# EAGLE board BURPS-v1.0 (EAGLE 5.12)
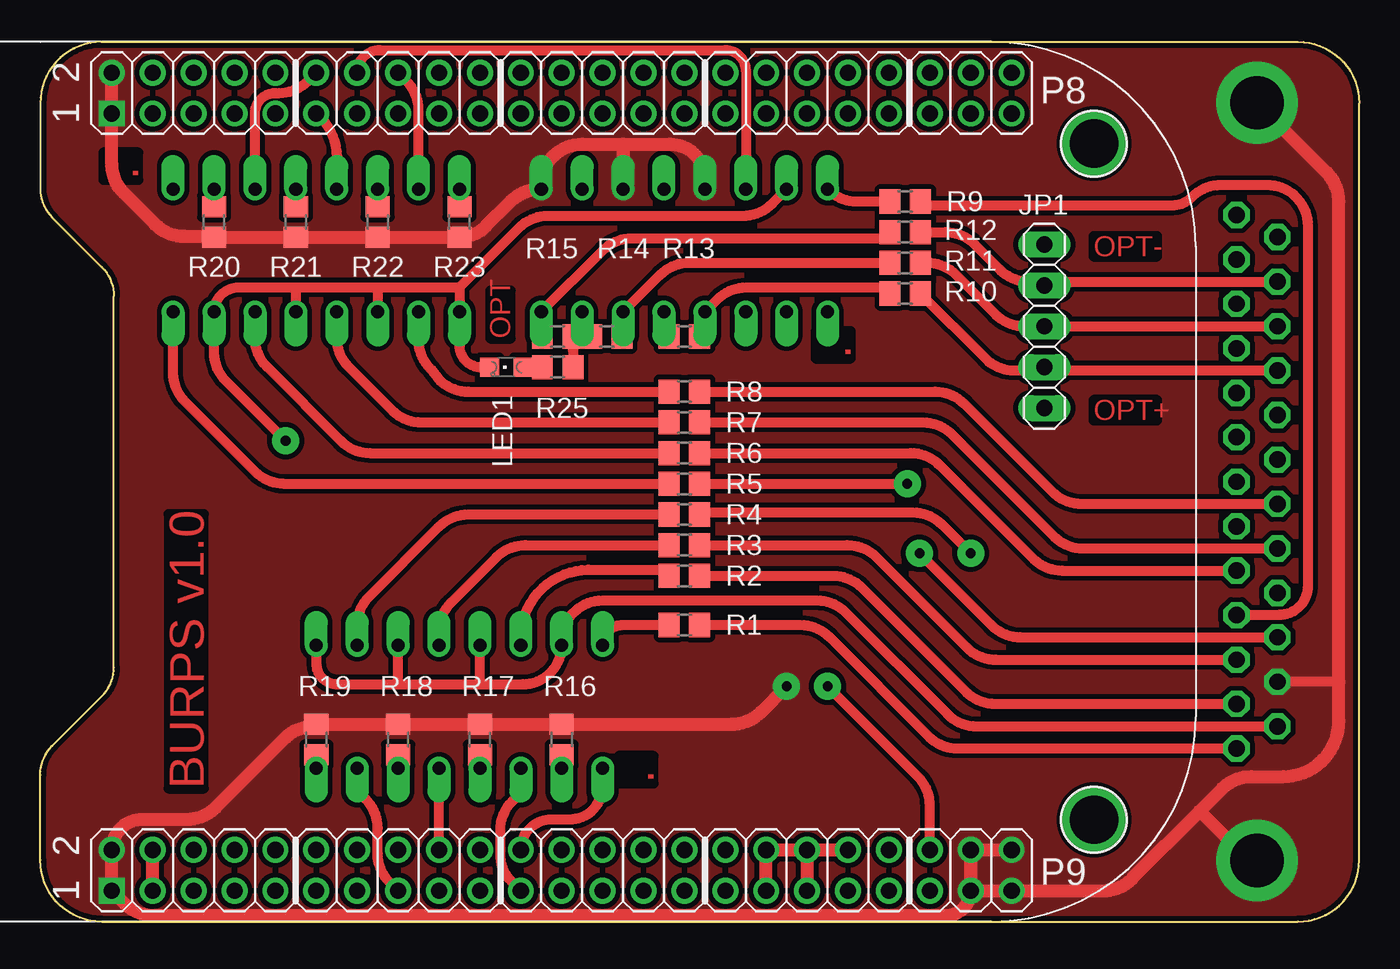
[diagram p0: board, top side]
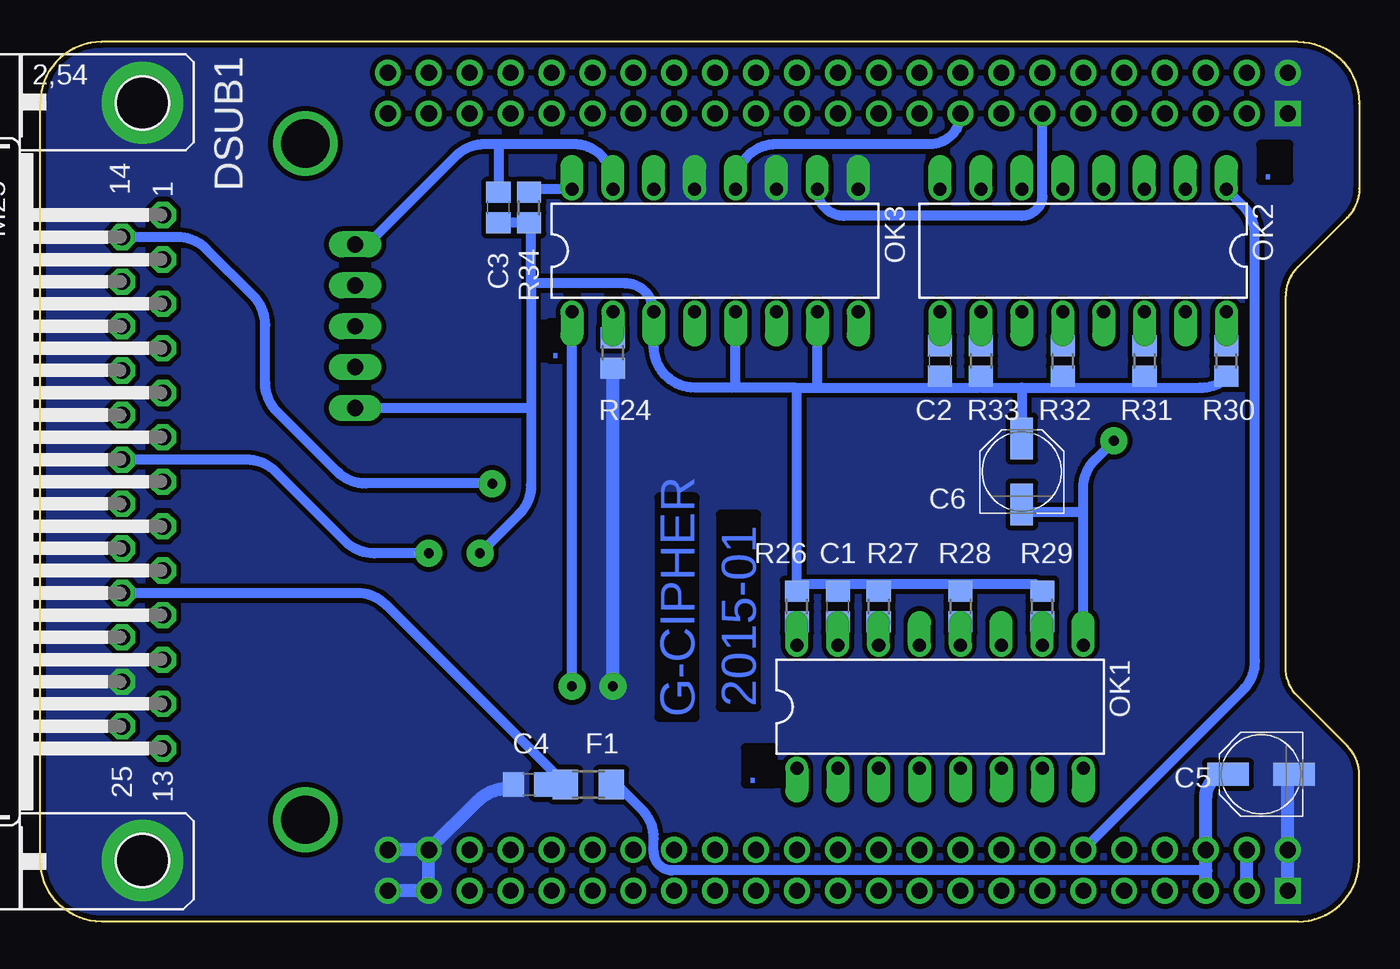
[diagram p1: board, bottom side, seen from below]

Size 81.91 x 54.61 mm. Coordinates in mm from the lower left corner, seen from the top.
Outline: 3.81,54.61 78.1,54.61 arc-90 81.91,50.8 81.91,3.81 arc-90 78.1,0 3.81,0 arc-90 0,3.81 0,9.11 arc-45 0.74,10.9 3.83,13.99 arc45 4.57,15.78 4.57,38.83 arc45 3.83,40.62 0.74,43.71 arc-45 0,45.5 0,50.8 arc-90 3.81,54.61
Copper layers (1*16): Top 0.035mm / dielectric 1.5mm / Bottom 0.035mm
Design rules "SparkFun10mil": minimum track width 10mil, minimum drill 20mil, track to track 10mil, track to pad 10mil, pad to pad 10mil, via to via 10mil, smd to smd 10mil, copper to edge 10mil, drill to drill 10mil, minimum pad ring 12mil, minimum via ring 10mil, stop-mask expansion 4mil, vias tented up to drill 25mil, thermal gap 10mil

## Footprints (pad centres in the part's own frame; a part is rotated, then mirrored left to right if it is on the bottom)
MICROBUILDER_BEAGLEBONE_SHIELD = drill 1 square: 1 4.445,19.05; 47 52.705,19.05 | drill 1 round: 2 1.905,19.05; 3 4.445,21.59; 4 1.905,21.59; 5 4.445,24.13; 6 1.905,24.13; 7 4.445,26.67; 8 1.905,26.67; 9 4.445,29.21; 10 1.905,29.21; 11 4.445,31.75; 12 1.905,31.75; 13 4.445,34.29; 14 1.905,34.29; 15 4.445,36.83; 16 1.905,36.83; 17 4.445,39.37; 18 1.905,39.37; 19 4.445,41.91; 20 1.905,41.91; 21 4.445,44.45; 22 1.905,44.45; 23 4.445,46.99; 24 1.905,46.99; 25 4.445,49.53; 26 1.905,49.53; 27 4.445,52.07; 28 1.905,52.07; 29 4.445,54.61; 30 1.905,54.61; 31 4.445,57.15; 32 1.905,57.15; 33 4.445,59.69; 34 1.905,59.69; 35 4.445,62.23; 36 1.905,62.23; 37 4.445,64.77; 38 1.905,64.77; 39 4.445,67.31; 40 1.905,67.31; 41 4.445,69.85; 42 1.905,69.85; 43 4.445,72.39; 44 1.905,72.39; 45 4.445,74.93; 46 1.905,74.93; 48 50.165,19.05; 49 52.705,21.59; 50 50.165,21.59; 51 52.705,24.13; 52 50.165,24.13; 53 52.705,26.67; 54 50.165,26.67; 55 52.705,29.21; 56 50.165,29.21; 57 52.705,31.75; 58 50.165,31.75; 59 52.705,34.29; 60 50.165,34.29; 61 52.705,36.83; 62 50.165,36.83; 63 52.705,39.37; 64 50.165,39.37; 65 52.705,41.91; 66 50.165,41.91; 67 52.705,44.45; 68 50.165,44.45; 69 52.705,46.99; 70 50.165,46.99; 71 52.705,49.53; 72 50.165,49.53; 73 52.705,52.07; 74 50.165,52.07; 75 52.705,54.61; 76 50.165,54.61; 77 52.705,57.15; 78 50.165,57.15; 79 52.705,59.69; 80 50.165,59.69; 81 52.705,62.23; 82 50.165,62.23; 83 52.705,64.77; 84 50.165,64.77; 85 52.705,67.31; 86 50.165,67.31; 87 52.705,69.85; 88 50.165,69.85; 89 52.705,72.39; 90 50.165,72.39; 91 52.705,74.93; 92 50.165,74.93
C0805 = smd 1.3 x 1.5: 1 -0.95,0; 2 0.95,0
PANASONIC_C = smd 2.6 x 1.4: + 2.05,0; - -2.05,0
M25HP = drill 1.016 octagon: 1 -16.561,1.27; 2 -13.792,1.27; 3 -11.049,1.27; 4 -8.28,1.27; 5 -5.512,1.27; 6 -2.769,1.27; 7 0,1.27; 8 2.769,1.27; 9 5.512,1.27; 10 8.28,1.27; 11 11.049,1.27; 12 13.792,1.27; 13 16.561,1.27; 14 -15.189,-1.27; 15 -12.421,-1.27; 16 -9.652,-1.27; 17 -6.909,-1.27; 18 -4.14,-1.27; 19 -1.372,-1.27; 20 1.372,-1.27; 21 4.14,-1.27; 22 6.909,-1.27; 23 9.652,-1.27; 24 12.421,-1.27; 25 15.189,-1.27 | drill 3.302 pad 5.08 round: G1 -23.52,0; G2 23.52,0
R1206 = smd 1.6 x 1.803: 1 -1.422,0; 2 1.422,0
1X05 = drill 1.016 long: 1 -5.08,0; 2 -2.54,0; 3 0,0; 4 2.54,0; 5 5.08,0
CHIPLED_0805 = smd 1.2 x 1.2: A 0,-1.05; C 0,1.05
DIL16 = drill 0.813 offset: 1 -8.89,-3.81; 2 -6.35,-3.81; 3 -3.81,-3.81; 4 -1.27,-3.81; 5 1.27,-3.81; 6 3.81,-3.81; 7 6.35,-3.81; 8 8.89,-3.81; 9 8.89,3.81; 10 6.35,3.81; 11 3.81,3.81; 12 1.27,3.81; 13 -1.27,3.81; 14 -3.81,3.81; 15 -6.35,3.81; 16 -8.89,3.81
R0805 = smd 1.3 x 1.5: 1 -0.95,0; 2 0.95,0
MOUNTINGHOLE_3.0_PLATEDTHIN@1 = drill 3 pad 3.6 round: P$1 0,0

## Placement (x,y rotation side)
BBB  MICROBUILDER_BEAGLEBONE_OUTLINE  [MICROBUILDER_BEAGLEBONE_SHIELD]  -14.61,54.61 270 top
C1  0.1  [C0805]  32.39,19.56 270 bottom
C2  0.1  [C0805]  26.04,34.8 90 bottom
C3  0.1  [C0805]  53.47,44.32 90 bottom
C4  0.1  [C0805]  51.56,8.51 180 bottom
C5  10uF 6.3V  [PANASONIC_C]  6.1,9.14 180 bottom
C6  10uF 25V  [PANASONIC_C]  20.96,27.94 90 bottom
DSUB1  DB25M  [M25HP]  75.56,27.3 270 bottom
F1  500mA  [R1206]  47.88,8.51 180 bottom
JP1  [1X05]  62.36,36.96 270 top
LED1  [CHIPLED_0805]  28.96,34.42 90 top
OK1  PS2501-4  [DIL16]  26.04,13.34 0 bottom
OK2  PS2501-4  [DIL16]  17.14,41.66 180 bottom
OK3  PS2501-4  [DIL16]  40,41.66 0 bottom
R1  22  [R0805]  40,18.41 0 top
R2  22  [R0805]  40,21.46 0 top
R3  22  [R0805]  40,23.37 0 top
R4  22  [R0805]  40,25.27 0 top
R5  22  [R0805]  40,27.18 0 top
R6  22  [R0805]  40,29.08 0 top
R7  22  [R0805]  40,30.99 0 top
R8  22  [R0805]  40,32.89 0 top
R9  22  [R0805]  53.72,44.7 0 top
R10  180  [R0805]  53.72,38.99 180 top
R11  180  [R0805]  53.72,40.89 180 top
R12  180  [R0805]  53.72,42.8 180 top
R13  680  [R0805]  40,36.32 0 top
R14  680  [R0805]  35.18,36.32 0 top
R15  680  [R0805]  32.13,36.32 180 top
R16  1K  [R0805]  32.39,11.3 270 top
R17  1K  [R0805]  27.3,11.3 270 top
R18  1K  [R0805]  22.22,11.3 270 top
R19  1K  [R0805]  17.14,11.3 270 top
R20  1K  [R0805]  10.79,43.43 90 top
R21  1K  [R0805]  15.88,43.43 90 top
R22  1K  [R0805]  20.96,43.43 90 top
R23  1K  [R0805]  26.04,43.43 90 top
R24  1K  [R0805]  46.36,35.31 90 bottom
R25  1K  [R0805]  32.13,34.42 180 top
R26  10K  [R0805]  34.92,19.56 90 bottom
R27  10K  [R0805]  29.85,19.56 90 bottom
R28  10K  [R0805]  24.76,19.56 90 bottom
R29  10K  [R0805]  19.68,19.56 90 bottom
R30  10K  [R0805]  8.25,34.8 270 bottom
R31  10K  [R0805]  13.34,34.8 270 bottom
R32  10K  [R0805]  18.42,34.8 270 bottom
R33  10K  [R0805]  23.5,34.8 270 bottom
R34  10K  [R0805]  51.56,44.32 270 bottom
U$22  MOUNTINGHOLE3.0THIN  [MOUNTINGHOLE_3.0_PLATEDTHIN@1]  65.44,48.3 0 top
U$23  MOUNTINGHOLE3.0THIN  [MOUNTINGHOLE_3.0_PLATEDTHIN@1]  65.44,6.32 0 top

## Library data of the parts
BBB = BURPS-v0.1
C1-C6 F1 R1-R34 = rcl
DSUB1 = con-subd; OC_FARNELL: unknown; OC_NEWARK: unknown
JP1 = pinhead
LED1 = led
OK1-OK3 = optocoupler; OC_FARNELL: 9707735; OC_NEWARK: unknown
U$22 U$23 = microbuilder

## Nets
+5V: BBB.51 BBB.52 C5.+ F1.1
_EN: BBB.58 OK2.1
AGND: BBB.79 BBB.80 BBB.81 BBB.82 BBB.84
AUX_1: BBB.57
AUX_2: BBB.59
DIR_A: BBB.61 OK1.7
DIR_A_OUT: DSUB1.19 R4.2
DIR_B: BBB.69
DIR_C: BBB.60
DIR_E: BBB.15
DIR_U: BBB.62
DIR_X: BBB.12 OK2.3
DIR_X_OUT: DSUB1.9 R6.2
DIR_Y: BBB.11 OK2.5
DIR_Y_OUT: DSUB1.21 R7.2
DIR_Z: BBB.16 OK2.7
DIR_Z_OUT: DSUB1.20 R8.2
EN_OUT: DSUB1.14 R5.2
END_X: BBB.13 OK3.10
END_X_IN: DSUB1.15 JP1.2 R12.1
END_Y: BBB.14 OK3.14
END_Y_IN: DSUB1.17 JP1.4 R10.1
END_Z: BBB.17 OK3.12
END_Z_IN: DSUB1.16 JP1.3 R11.1
GND: BBB.1 BBB.2 BBB.47 BBB.48 BBB.89 BBB.90 BBB.91 BBB.92 C4.2 C5.- DSUB1.24 DSUB1.G1 DSUB1.G2 OK3.9 OK3.11 OK3.13 R16.1 R17.1 R18.1 R19.1 R20.1 R21.1 R22.1 R23.1 R24.1
GPIO1_6: BBB.3
GPIO1_7: BBB.4
GPIO2_6: BBB.45
GPIO2_7: BBB.46
GPIO2_8: BBB.43
GPIO2_9: BBB.44
GPIO2_11: BBB.42
IN4: DSUB1.18
IN5: DSUB1.5
IN6: DSUB1.6
IN7: DSUB1.7
IN8: DSUB1.8
N$1: OK3.2 R24.2
N$2: OK1.2 R16.2
N$3: OK1.4 R17.2
N$4: OK1.6 R18.2
N$5: OK2.4 R21.2
N$6: OK2.6 R22.2
N$7: OK2.8 R23.2
N$8: OK1.8 R19.2
N$9: OK3.6 R11.2 R14.2
N$10: LED1.A R25.2
N$11: OK2.2 R20.2
N$12: OK3.4 R10.2 R13.2
N$13: OK3.8 R12.2 R15.2
N$14: OK2.14 R6.1 R31.1
N$15: OK2.12 R7.1 R32.1
N$16: OK2.10 R8.1 R33.1
N$17: OK1.10 R4.1 R29.1
N$18: OK3.16 R9.1 R34.1
N$19: OK1.16 R1.1 R26.1
N$20: OK1.14 R2.1 R27.1
N$21: OK1.12 R3.1 R28.1
N$24: OK2.16 R5.1 R30.1
OPT_GND_IN: C1.2 C2.2 C3.2 C6.- DSUB1.25 JP1.1 LED1.C OK1.9 OK1.11 OK1.13 OK1.15 OK2.9 OK2.11 OK2.13 OK2.15 OK3.15
OPT_VCC_IN: C1.1 C2.1 C3.1 C6.+ DSUB1.23 JP1.5 OK3.3 OK3.5 OK3.7 R13.1 R14.1 R15.1 R25.1 R26.2 R27.2 R28.2 R29.2 R30.2 R31.2 R32.2 R33.2 R34.2
OUT1: DSUB1.1
OUT2: DSUB1.2
OUT3: DSUB1.3
OUT4: DSUB1.4
PWM_1: BBB.9
PWM_2: BBB.10
PWM_3: BBB.7
PWM_4: BBB.8
STEP_A: BBB.88 OK3.1
STEP_A_OUT: DSUB1.10 R9.2
STEP_B: BBB.72
STEP_C: BBB.70
STEP_E: BBB.63
STEP_U: BBB.87
STEP_X: BBB.68 OK1.1
STEP_X_OUT: DSUB1.13 R1.2
STEP_Y: BBB.67 OK1.3
STEP_Y_OUT: DSUB1.12 R2.2
STEP_Z: BBB.64 OK1.5
STEP_Z_OUT: DSUB1.11 R3.2
TEMP_1: BBB.85
TEMP_2: BBB.86
TEMP_3: BBB.83
VCC_OUT: C4.1 DSUB1.22 F1.2
VDD_3V3EXP: BBB.49 BBB.50
VDD_ADC: BBB.78

## Tracks (layer width: path | path; a pad name or v marks a point on that pad's centre or on a via)
+5V
  Bottom 0.61: 9.52,3.17 42.67,3.17 arc90 43.81,4.32 43.81,5.17 arc-45 44.56,6.97 45.85,8.26 arc-45 F1.1
  Bottom 0.813: BBB.51 9.52,3.17 BBB.52 9.52,7.76 arc90 C5.+
_EN
  Bottom 0.61: BBB.58 7.22,14.37 arc-45 6.48,16.16 6.48,42.64 arc-45 7.22,44.43 OK2.1
AGND
  Top 0.813: BBB.79 BBB.80 BBB.82 | BBB.82 BBB.81 | BBB.82 BBB.84
DIR_A
  Top 0.61: BBB.61 21.7,2.43 arc-45 20.96,4.23 20.96,5.81 arc45 20.21,7.6 19.68,8.13 OK1.7
DIR_A_OUT  (via drill 0.6 pad 1.68)
  Top 0.61: R4.2 arc-45 41.26,25.4 54.19,25.4 arc-45 55.99,24.66 v57.78,22.86
  Bottom 0.61: v57.78,22.86 61.18,22.86 arc45 62.97,23.6 67.3,27.93 arc-45 69.1,28.68 DSUB1.19
DIR_X
  Top 0.61: BBB.12 16.62,52.18 arc-45 14.82,51.44 14.61,51.44 arc90 13.34,50.16 OK2.3
DIR_X_OUT
  Top 0.61: R6.2 54.07,29.08 arc-45 55.86,28.34 61.66,22.54 arc45 63.46,21.79 DSUB1.9
DIR_Y
  Top 0.61: BBB.11 17.67,49.64 arc-45 18.42,46.83 OK2.5
DIR_Y_OUT
  Top 0.61: R7.2 54.83,30.99 arc-45 56.62,30.24 62.96,23.91 arc45 64.75,23.16 DSUB1.21
DIR_Z
  Top 0.61: BBB.16 22.75,52.18 arc-45 23.5,50.38 OK2.7
DIR_Z_OUT
  Top 0.61: R8.2 55.59,32.89 arc-45 57.39,32.15 62.86,26.68 arc45 64.65,25.93 DSUB1.20
EN_OUT  (via drill 0.6 pad 1.68)
  Top 0.61: R5.2 v53.85,27.18
  Bottom 0.61: DSUB1.14 73.39,42.49 arc45 71.59,41.75 68.69,38.84 arc45 67.94,37.05 67.94,33.44 arc-45 67.2,31.64 63.5,27.94 arc-45 61.7,27.2 53.87,27.2 v53.85,27.18
END_X
  Bottom 0.61: OK3.10 arc-90 32,43.81 20.96,43.81 arc-90 19.68,45.09 BBB.13
END_X_IN
  Top 0.61: R12.1 56.22,42.8 arc-45 58.02,42.05 59.61,40.47 arc45 61.4,39.73 62.36,39.73 | 62.36,39.73 DSUB1.15 | 62.36,39.73 JP1.2
END_Y
  Top 0.61: BBB.14 arc-90 21.08,54.1 42.55,54.1 arc-90 43.81,52.83 OK3.14
END_Y_IN
  Top 0.61: R10.1 58.7,34.96 arc45 60.5,34.21 62.36,34.21 | 62.36,34.21 DSUB1.17 | 62.36,34.21 JP1.4
END_Z
  Bottom 0.61: BBB.17 arc90 26.67,48.26 36.19,48.26 arc-90 38.73,45.72 OK3.12
END_Z_IN
  Top 0.61: R11.1 55.08,40.89 arc-45 56.88,40.15 59.33,37.7 arc45 61.12,36.96 61.59,36.96 JP1.3 DSUB1.16
GND  (via drill 0.6 pad 1.68)
  Top 0.61: 31.11,45.72 OK3.9 31.02,45.47 | DSUB1.24 80.58,14.88 arc-45 80.64,14.86 | 16.77,12.06 17.14,12.06 R19.1
  Top 0.813: BBB.2 BBB.1 4.45,47.03 arc45 5.19,45.23 7.13,43.29 arc45 8.93,42.55 10.65,42.55 arc-45 R20.1 R21.1 R22.1 R23.1 arc45 27.67,43.16 29.23,44.72 arc-45 31.02,45.47 | OK3.13 41.28,46.1 arc90 39.12,48.26 36.19,48.26 | 36.19,48.26 OK3.11 | 31.11,45.72 arc-90 33.66,48.26 36.19,48.26 | BBB.89 arc-90 56.26,0.38 7.02,0.38 arc-45 5.22,1.12 BBB.47 BBB.48 arc-90 6.35,6.35 9.11,6.35 arc45 10.9,7.09 15.24,11.43 arc-45 16.77,12.06 | BBB.89 BBB.91 66,1.91 arc45 67.8,2.65 72.01,6.86 | BBB.89 BBB.90 BBB.92 | R19.1 R18.1 R17.1 R16.1 42.95,12.25 arc45 44.75,13 v46.36,14.61 | DSUB1.G1 79.9,46.49 arc-45 80.64,44.69 80.64,14.86 80.64,12.45 arc-90 77.2,9 75.2,9 arc45 73.41,8.26 72.01,6.86 | 72.01,6.86 74.7,4.17 arc45 75.56,3.81
  Bottom 0.813: v46.36,14.61 R24.1 | BBB.90 BBB.92 | BBB.90 BBB.89 BBB.91 | BBB.90 54.72,7.51 arc45 52.92,8.26 52.45,8.26 | 4.45,9.14 BBB.48 BBB.47
  pour Top (isolate 0.305, no thermals): 3.81,0 78.1,0 arc90 81.91,3.81 81.91,50.8 arc90 78.1,54.61 3.81,54.61 arc90 0,50.8 0,45.5 arc45 0.74,43.71 3.83,40.62 arc-45 4.57,38.83 4.57,15.78 arc-45 3.83,13.99 0.74,10.9 arc45 0,9.11 0,3.81 arc90
  pour Bottom (isolate 0.305, no thermals): 3.81,54.61 78.1,54.61 arc-90 81.91,50.8 81.91,3.81 arc-90 78.1,0 3.81,0 arc-90 0,3.81 0,9.11 arc-45 0.74,10.9 3.83,13.99 arc45 4.57,15.78 4.57,38.83 arc45 3.83,40.62 0.74,43.71 arc-45 0,45.5 0,50.8 arc-90
N$1
  Bottom 0.813: R24.2 OK3.2
N$2
  Top 0.61: OK1.2 R16.2
N$3
  Top 0.61: OK1.4 R17.2
N$4
  Top 0.61: OK1.6 R18.2
N$5
  Top 0.61: OK2.4 R21.2
N$6
  Top 0.61: OK2.6 R22.2
N$7
  Top 0.61: OK2.8 R23.2
N$8
  Top 0.61: OK1.8 R19.2
N$9
  Top 0.61: R14.2 arc90 36.19,35.88 OK3.6 38.5,40.15 arc-45 40.3,40.89 R11.2
N$10
  Top 0.61: LED1.A R25.2
N$11
  Top 0.61: R20.2 OK2.2
N$12
  Top 0.61: R13.2 arc90 41.28,36.26 OK3.4 42.05,38.63 arc-45 43.85,39.37 52.39,39.37 arc-90 R10.2
N$13
  Top 0.61: R15.2 arc-90 31.11,35.88 OK3.8 34.94,41.67 arc-45 36.74,42.42 52.39,42.42 arc90 R12.2
N$14
  Top 0.61: R6.1 20.48,29.08 arc-45 18.69,29.83 14.08,34.44 arc-45 13.34,36.23 OK2.14
  Bottom 0.61: OK2.14 R31.1
N$15
  Top 0.61: R7.1 23.66,30.99 arc-45 21.86,31.73 19.16,34.44 arc-45 18.42,36.23 OK2.12
  Bottom 0.61: OK2.12 R32.1
N$16
  Top 0.61: R8.1 26.58,32.89 arc-45 24.78,33.64 24.24,34.31 arc-45 23.5,36.1 OK2.10
  Bottom 0.61: OK2.10 R33.1
N$17
  Top 0.61: R4.1 26.58,25.27 arc45 24.78,24.53 20.43,20.18 arc45 19.68,18.38 OK1.10
  Bottom 0.61: OK1.10 R29.1
N$18
  Top 0.61: OK3.16 48.91,45.45 arc45 50.71,44.7 R9.1
  Bottom 0.61: 49.15,45.47 OK3.16 51.37,45.47 arc-90 R34.1
N$19
  Top 0.61: R1.1 36.19,18.41 arc90 OK1.16
  Bottom 0.61: OK1.16 R26.1
N$20
  Top 0.61: OK1.14 29.85,17.53 arc-90 34.04,21.84 38.73,21.84 38.73,21.78 arc90 R2.1
  Bottom 0.61: OK1.14 R27.1
N$21
  Top 0.61: R3.1 30.14,23.37 arc45 28.34,22.62 25.51,19.79 arc45 24.76,18 OK1.12
  Bottom 0.61: OK1.12 R28.1
N$24
  Top 0.61: OK2.16 8.25,34.07 arc45 9,32.28 13.35,27.92 arc45 15.15,27.18 R5.1
  Bottom 0.61: OK2.16 R30.1
OPT_GND_IN  (via drill 0.6 pad 1.68)
  Top 0.61: 15.88,39.37 12.32,39.37 arc90 OK2.15 10.79,35.34 arc45 11.54,33.55 v15.24,29.84 | 15.88,39.37 20.96,39.37 | 20.96,39.37 26.04,39.37 | 15.88,39.37 OK2.13 | 20.96,39.37 OK2.11 | 26.04,39.37 OK2.9 C2.2 arc90 27.37,34.42 LED1.C | 26.04,39.37 29.74,43.07 arc-45 31.53,43.81 43.65,43.81 arc45 45.45,44.56 OK3.15 | DSUB1.25 58.15,12.12 arc-45 56.35,12.86 50.02,19.2 arc45 48.22,19.94 34.92,19.94 arc90 32.39,17.4 OK1.15 arc-90 29.97,14.73 27.3,14.73 | OK1.9 17.14,16 arc90 18.42,14.73 22.22,14.73 | 22.22,14.73 OK1.11 | 27.3,14.73 OK1.13 | 22.22,14.73 27.3,14.73
  Bottom 0.61: OK1.9 17.14,25.4 | 17.14,25.4 17.14,26.89 arc45 16.4,28.68 v15.24,29.84 | 53.47,48.26 48.77,48.26 arc90 46.36,45.85 OK3.15 | 53.47,48.26 54.32,48.26 arc-45 56.12,47.52 61.59,42.04 JP1.1 | C6.- arc-90 20.46,25.4 17.14,25.4 | OK2.9 C2.2 | OK1.15 C1.2 | 53.47,48.26 C3.2
OPT_VCC_IN  (via drill 0.6 pad 1.68)
  Top 0.61: 33.66,36.32 R15.1 | OK3.7 33.66,36.32 | 33.66,36.32 33.66,36.07 | 33.91,36.07 R14.1 | 33.66,36.07 arc-90 33.91,36.07 | 33.66,36.32 33.91,36.07 | R13.1 arc-90 38.73,36.26 OK3.5 | DSUB1.23 60.87,17.65 arc-45 59.07,18.4 v54.61,22.86 | R25.1 33.08,35.49 arc-90 33.66,36.07
  Bottom 0.61: 33.66,33.15 OK3.7 | 35.05,33.15 33.66,33.15 | 35.05,33.15 38.99,33.15 | 38.99,33.15 41.28,33.15 arc90 43.81,35.69 OK3.3 arc-90 45.59,39.62 51.44,39.62 | OK3.5 38.73,33.4 arc90 38.99,33.15 | 33.66,33.15 26.04,33.15 | 26.04,33.15 23.56,33.15 arc-90 R33.2 23.5,33.15 20.96,33.15 | 18.42,33.15 13.21,33.15 | 20.96,33.15 18.42,33.15 | 18.42,33.15 R32.2 | 35.05,33.15 arc45 34.92,32.84 R26.2 34.92,20.95 31.94,20.95 | v54.61,22.86 52.18,25.29 arc-45 51.44,27.09 51.44,31.75 | 51.44,39.62 51.44,31.75 | 29.97,20.95 24.64,20.95 24.64,20.82 arc45 R28.2 24.76,20.95 20.25,20.95 arc45 19.94,20.83 arc-45 19.89,20.71 R29.2 | 29.97,20.95 R27.2 arc45 29.97,20.82 29.97,20.95 | 13.21,33.15 R31.2 | 13.21,33.15 9.88,33.15 arc-45 8.21,33.76 R30.2 | JP1.5 51.74,31.88 arc45 51.44,31.75 | 20.96,33.15 C6.+ | 26.04,33.15 C2.1 | 31.94,20.95 arc-90 C1.1 | 29.97,20.95 31.94,20.95 | 51.44,39.62 51.44,43.18 arc90 51.56,43.31 R34.2 C3.1
STEP_A  (via drill 0.6 pad 1.68)
  Top 0.61: BBB.88 55.24,7.2 arc45 54.5,9 v48.89,14.61
  Bottom 0.61: v48.89,14.61 OK3.1
STEP_A_OUT
  Top 0.61: DSUB1.10 arc90 74.32,19.05 76.96,19.05 arc90 78.74,20.83 78.74,43.18 arc90 76.2,45.72 73.31,45.72 arc45 71.52,44.98 71.5,44.96 arc-45 70.27,44.45 54.92,44.45 arc-90 R9.2
STEP_X
  Top 0.61: BBB.68 arc-90 31.75,6.35 32.89,6.35 arc90 34.92,8.38 OK1.1
STEP_X_OUT
  Top 0.61: R1.2 47.21,18.41 arc-45 49,17.67 55.19,11.49 arc45 56.98,10.74 DSUB1.13
STEP_Y
  Top 0.61: BBB.67 29.29,2.46 arc-45 28.57,4.19 28.57,5.68 arc-45 29.32,7.47 29.85,8 OK1.3
STEP_Y_OUT
  Top 0.61: R2.2 49.24,21.46 arc-45 51.04,20.72 57.5,14.26 arc45 59.29,13.51 DSUB1.12
STEP_Z
  Top 0.61: BBB.64 OK1.5
STEP_Z_OUT
  Top 0.61: R3.2 50.13,23.37 arc-45 51.92,22.62 57.55,17 arc45 59.34,16.26 DSUB1.11
VCC_OUT
  Bottom 0.61: DSUB1.22 62.24,20.4 arc45 60.44,19.65 F1.2 C4.1
VDD_3V3EXP
  Top 0.813: BBB.49 BBB.50
  Bottom 0.813: BBB.49 BBB.50

## Text on the board
Top: . | OPT- | OPT | . | OPT+ | . | BURPS v1.0
Bottom: . | . | 2015-01 | G-CIPHER | .
tPlace: 2 | P8 | 1 | 2 | P9 | 1